# Altium PCB USB2CAN.PcbDoc
Units mil, origin at the board's own origin, x right, y up, seen from the top; angles counter-clockwise.
Board outline 2715.31 x 1015 mil, 2 copper layers (Top Layer, Bottom Layer); 30 components, 25 nets, 157 pads, 36 vias.
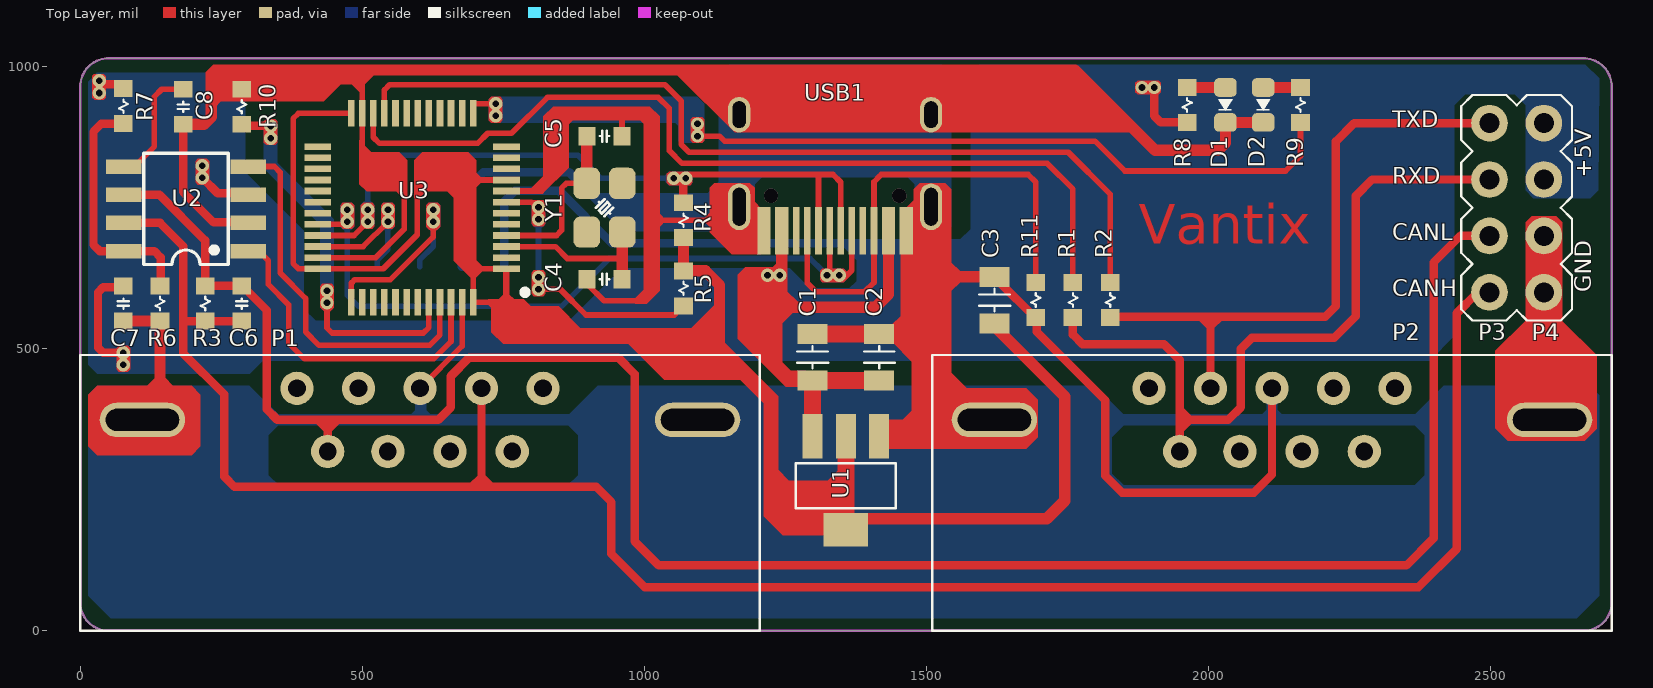
[diagram p0: Top Layer view]
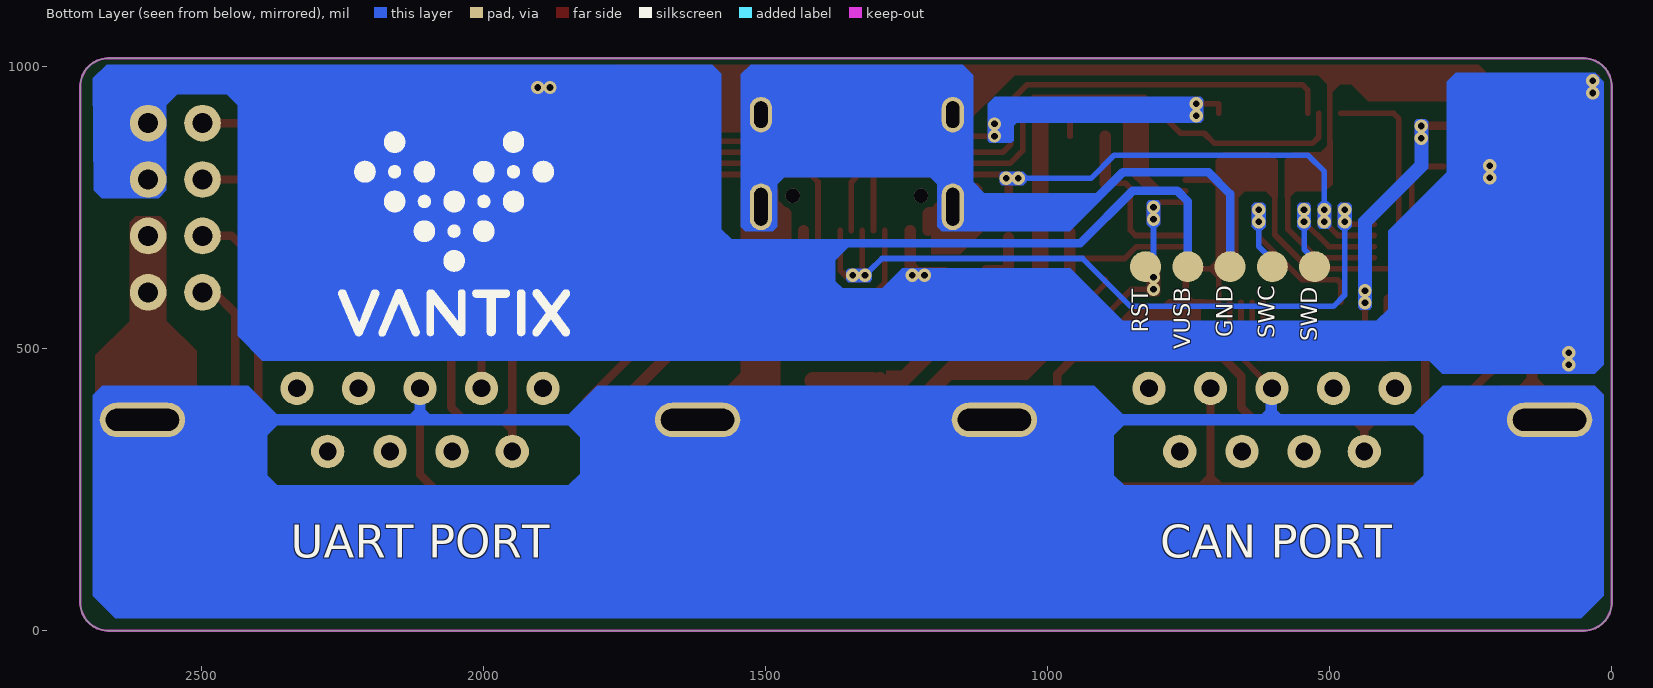
[diagram p1: Bottom Layer view, seen from below]
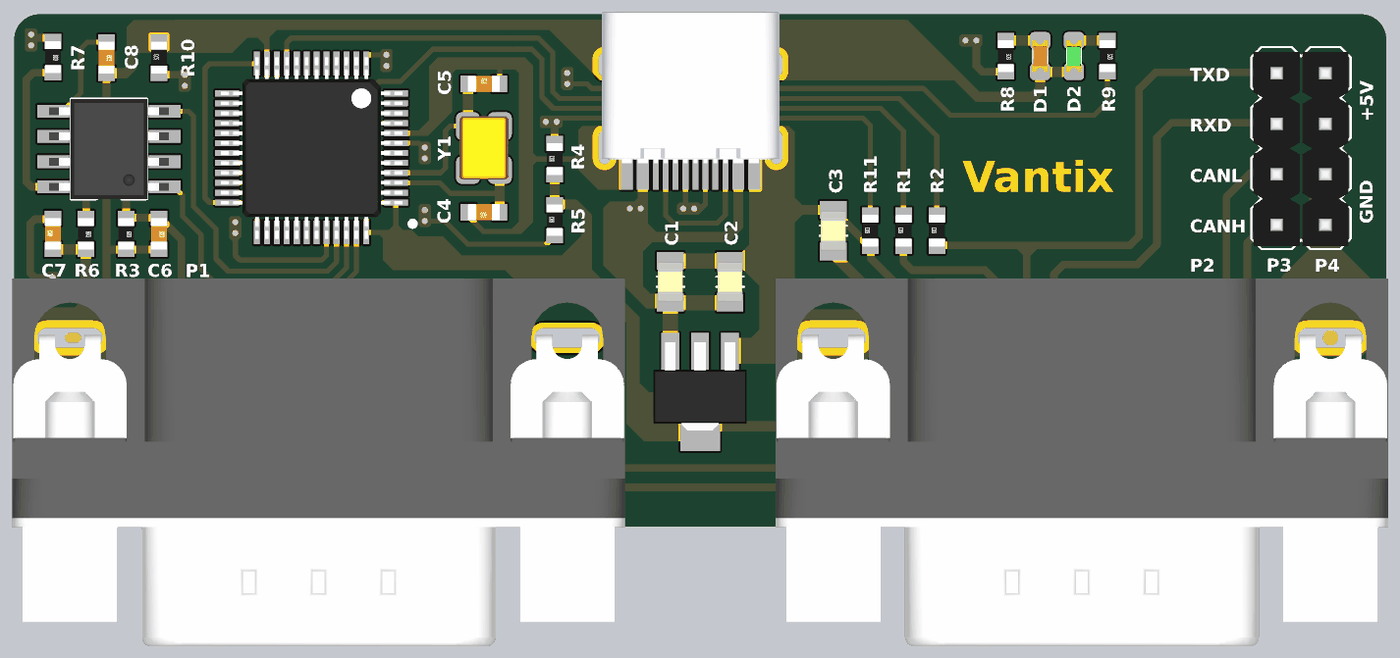
[diagram p2: 3D render of the assembled board from above, using the file's embedded part models]

## Layer stack, top to bottom
Top Solder: solder mask 0.4, Solder Resist, Dk 3.5
Top Layer: signal copper 1.4
Dielectric 1: dielectric 12.6, FR-4, Dk 4.8
Bottom Layer: signal copper 1.4
Bottom Solder: solder mask 0.4, Solder Resist, Dk 3.5

## Board outline
0,50 ccw(c50,50) 50,0 2665.31,0 ccw(c2665.31,50) 2715.31,50 2715.31,965 ccw(c2665.31,965) 2665.31,1015 50,1015 ccw(c50,965) 0,965

## Design rules (kind name [scope] priority, off if disabled: settings)
Clearance [All] p1: gap=6 ignorepadtopadclearanceinfootprint=FALSE
PolygonConnect [All] p1: connectstyle=Relief reliefconductorwidth=10 reliefentries=4 polygonreliefangle="90 Angle" airgapwidth=10
RoutingVias [All] p1: holewidth=28 width=50 viastyle="Through Hole" minholewidth=28 minwidth=50 maxholewidth=28 maxwidth=50
SolderMaskExpansion [All] p1: expansion=4
Width [All] p1: maxlimit=30 minlimit=10 preferedwidth=20
30 further rules are at their usual default settings.

## Components (designator, comment, footprint, x,y, rotation, side; value= is the part's Value field where it differs from the comment)
C1 "CAP_NP" C_0805 1298.31,485 r270 top
C2 "CAP_NP" C_0805 1416.42,485 r270 top
C3 "CAP_NP" C_0805 1620.89,586.2 r270 top
C4 "CAP_NP" C_0603 930.49,623.06 r180 top
C5 "CAP_NP" C_0603 928.49,876.94 r0 top
C6 "CAP_NP" C_0603 286.49,581 r270 top
C7 "CAP_NP" C_0603 76.49,579 r90 top
C8 "CAP_NP" C_0603 182.49,930 r270 top
D1 "LED" LED-0603-R 2030.42,932.2 r90 top
D2 "LED" LED-0603-G 2097.39,932.2 r90 top
P1 "DP9" "DR9T MALE" 602.36,373.91 r0 top
P2 "DP9" "DR9T MALE" 2112.95,373.91 r0 top
P3 "HEADER 4" "JUMP 4" 2498.49,750 r270 top
P4 "HEADER 4" "JUMP 4" 2594.94,750 r270 top
R1 "R" R_0603 1760,586.2 r0 top
R2 "R" R_0603 1826,586.2 r0 top
R3 "R" R_0603 221.49,580 r180 top
R4 "R" R_0603 1069.49,727.87 r0 top
R5 "R" R_0603 1069.49,607.06 r0 top
R6 "R" R_0603 141.49,580 r180 top
R7 "R" R_0603 76.49,930 r180 top
R8 "R" R_0603 1962.49,932.17 r180 top
R9 "R" R_0603 2163.39,932.17 r180 top
R10 "R" R_0603 286.49,929 r0 top
R11 "R" R_0603 1694,586.2 r0 top
U1 "AMS1117" "SOT 89" 1357.37,257 r180 top
U2 "CAN TRANSEIVER" SOP8 187.49,748 r90 top
U3 "STM32F103C8T6" LQFP-48 588.49,750 r90 top locked
USB1 "USB C 16P" "USB C 16P" 1338.41,729.17 r0 top locked
Y1 "12MHz" CRYSTAL-3225 929.49,750 r270 top

## Footprints (in the part's own frame and the unit in brackets; to place one, negate y for a bottom-side part, rotate by r counter-clockwise, add the part's x,y. Pads: shape width x height; smd on the part's side, far side on the other; paste and mask are expansions set on the pad)
C_0603 [mil]
  rect 30x33 smd: 1(-30,0) 2(32,0)
  silkscreen extent -8,-10 10,10, body extent -30,-16 32,16, height 12
C_0805 [mm]
  rect 0.9x1.35 smd: 1(-1.05,0) 2(1.05,0)
  silkscreen extent -0.51,-0.69 0.51,0.71, body extent -1,-0.63 1,0.64, height 0.57
CRYSTAL-3225 [mm]
  rrect50% 1.4x1.2 smd: 1(-1.1,-0.8) 2(-1.1,0.8) 3(1.1,0.8) 4(1.1,-0.8)
  silkscreen extent -0.38,-0.38 0.38,0.38, body extent -1.6,-1.25 1.6,1.25, height 0.77
"DR9T MALE" [mm]
  oval 3.85x1.55 hole 3.3 slot 1 at 90 deg: 0(-12.5,0) 0(12.5,0)
  round 1.5 hole 0.8: 1(-5.54,1.42) 2(-4.155,-1.42) 3(-2.77,1.42) 4(-1.448,-1.42) 5(0,1.42) 6(1.354,-1.42) 7(2.77,1.42) 8(4.155,-1.42) 9(5.54,1.42)
  silkscreen extent -15.3,-9.5 15.3,2.92, body extent -15.4,-15.52 15.4,2.98, height 12.51
"JUMP 4" [mil]
  round 65 hole 35.43: 1(-150,0) 2(-50,0) 3(50,0) 4(150,0)
  silkscreen extent -200,-50 200,48, body extent -190,-46 194,46, height 320
LED-0603-G [mil] "SMDCHIP-SIZE"
  rrect50% 33x40 smd: 1(31,0) 2(-31,0)
  silkscreen extent -10,-13 10,12, body extent -31,-16 32,16, height 24
LED-0603-R [mil] "SMDCHIP SIZE"
  rrect50% 33x40 smd: 1(31,0) 2(-31,0)
  silkscreen extent -10,-13 10,12, body extent -31,-16 32,16, height 26
LQFP-48 [mm] "for STM8S105C6T6"
  rect 0.3x1.2 smd: 1(-2.75,-4.25) 2(-2.25,-4.25) 3(-1.75,-4.25) 4(-1.25,-4.25) 5(-0.75,-4.25) 6(-0.25,-4.25) 7(0.25,-4.25) 8(0.75,-4.25) 9(1.25,-4.25) 10(1.75,-4.25) 11(2.25,-4.25) 12(2.75,-4.25) 25(2.75,4.25) 26(2.25,4.25) 27(1.75,4.25) 28(1.25,4.25) 29(0.75,4.25) 30(0.25,4.25) 31(-0.25,4.25) 32(-0.75,4.25) 33(-1.25,4.25) 34(-1.75,4.25) 35(-2.25,4.25) 36(-2.75,4.25)
  rect 1.2x0.3 smd: 13(4.25,-2.75) 14(4.25,-2.25) 15(4.25,-1.75) 16(4.25,-1.25) 17(4.25,-0.75) 18(4.25,-0.25) 19(4.25,0.25) 20(4.25,0.75) 21(4.25,1.25) 22(4.25,1.75) 23(4.25,2.25) 24(4.25,2.75) 37(-4.25,2.75) 38(-4.25,2.25) 39(-4.25,1.75) 40(-4.25,1.25) 41(-4.25,0.75) 42(-4.25,0.25) 43(-4.25,-0.25) 44(-4.25,-0.75) 45(-4.25,-1.25) 46(-4.25,-1.75) 47(-4.25,-2.25) 48(-4.25,-2.75)
  silkscreen extent -3.94,-5.21 -3.68,-4.95, body extent -4.57,-4.57 4.57,4.57, height 1.62
R_0603 [mil]
  rect 33x30 smd: 1(0,31) 2(0,-31)
  silkscreen extent -8,-12 8,12, body extent -16,-31 16,32, height 12
SOP8 [mm]
  rect 0.65x1.6 smd: 1(-1.905,-2.8) 2(-0.635,-2.8) 3(0.635,-2.8) 4(1.905,-2.8) 5(1.905,2.8) 6(0.635,2.8) 7(-0.635,2.8) 8(-1.905,2.8)
  silkscreen extent -2.51,-1.91 2.51,1.91, body extent -2.51,-3.02 2.51,3.02, height 1.6
"SOT 89" [mm]
  rect 0.9x2 smd: 1(-1.5,-2.225) 2(0,-2.225) 3(1.5,-2.225)
  rect 2x1.5 smd: 2(0,1.975)
  silkscreen extent -2.25,-1.02 2.25,1.02, body extent -2.35,-2.76 2.35,1.69, height 1.71
"USB C 16P" [mm]
  oval 1x2.1 hole 0.6 slot 1.7 at 90 deg: 0(-4.32,0.57) 0(4.32,0.57)
  oval 1x1.6 hole 0.6 slot 1.2 at 90 deg: 0(-4.32,4.72) 0(4.32,4.72)
  rect 0.6x2.14 smd: 1(3.2,-0.5) 2(2.4,-0.5) 11(-2.4,-0.5) 12(-3.2,-0.5)
  rect 0.3x2.14 smd: 3(1.75,-0.5) 4(1.25,-0.5) 5(0.75,-0.5) 6(0.25,-0.5) 7(-0.25,-0.5) 8(-0.75,-0.5) 9(-1.25,-0.5) 10(-1.75,-0.5)
  body extent -4.47,-0.23 4.47,7.35, height 3.26

## Part data
D1 D2: "Blue 465nm LED Indication - Discrete 3.8V 0603 (1608 Metric)", Color=Blue, Current - Test=20mA, Lens Color=Colorless, Manufacturer="Everlight Electronics Co Ltd", Manufacturer Part Number=QTLP600CBTR, Millicandela Rating=20mcd, Package / Case="0603 (1608 Metric)", Supplier Part Number 1=1080-1401-2-ND, Voltage - Forward (Vf) (Typ)=3.8V, Category=Optoelectronics, ComponentLink1Description=http://media.digikey.com/pdf/Data%20Sheets/Everlight%20PDFs/QTLP600C.pdf, ComponentLink1URL=http://media.digikey.com/pdf/Data%20Sheets/Everlight%20PDFs/QTLP600C.pdf, Features=-, Height (Max)=0.80mm, Lens Style/Size="Rectangle with Flat Top, 1.20mm x 0.80mm", Lens Transparency=Clear, Mounting Type="Surface Mount", Packaging="Tape & Reel (TR)", Part Status=Active, Pricing 1="2000=0.23786, 6000=0.22937, 10000=0.22597 (USD)", RoHS="RoHS Compliant", Size / Dimension="1.60mm L x 0.80mm W", Stock 1=2000, Supplier 1=Digi-Key, Viewing Angle=100°, Wavelength - Dominant=465nm, Wavelength - Peak=430nm
R1 R2 R3 R4 R5 R6 R7 R8 R9 R10 R11: library part RESISTOR
U2: library part MCP2551
U3: "MCU 32BIT 64KB FLASH 48LQFP;  ARM® Cortex®-M3 STM32 F1 Microcontroller IC 32-Bit 72MHz 64KB (64K x 8) FLASH", Manufacturer=STMicroelectronics, Operating Temperature="-40°C ~ 85°C (TA)", Package / Case=48-LQFP, Supplier Part Number 1=497-6063-ND, Voltage - Supply (Vcc/Vdd)="2 V ~ 3.6 V", Category="Integrated Circuits (ICs)", ComponentLink1Description=http://media.digikey.com/pdf/Data%20Sheets/ST%20Microelectronics%20PDFS/STM32F103x8,B.pdf, ComponentLink1URL=http://media.digikey.com/pdf/Data%20Sheets/ST%20Microelectronics%20PDFS/STM32F103x8,B.pdf, Connectivity="CAN, I²C, IrDA, LIN, SPI, UART/USART, USB", Core Processor="ARM® Cortex®-M3", Core Size=32-Bit, Data Converters="A/D 10x12b", EEPROM Size=-, Manufacturer Part Number=STM32F103C8T6, Number of I/O=37, Oscillator Type=Internal, Packaging=Tray, Part Status=Active, Peripherals="DMA, Motor Control PWM, PDR, POR, PVD, PWM, Temp Sensor, WDT", Pricing 1="1=6.06, 10=5.438, 100=4.4558, 500=3.7931, 1000=3.199 (USD)", Program Memory Size="64KB (64K x 8)", Program Memory Type=FLASH, RAM Size="20K x 8", RoHS="RoHS Compliant", Speed=72MHz, Stock 1=3485, Supplier 1=Digi-Key
Y1: library part CRYSTAL-3225

## Free pads (board coordinates)
  round 55 smd far side: 1(526.89,645.5) 2(601.79,645.5) 3(676.69,645.5) 4(751.59,645.5) 5(826.49,645.5)

## Via types
v1: diameter 23.62, hole 11.81, Top Layer to Bottom Layer, tented both sides, 34 vias
v2: diameter 25.59, hole 25.59, Top Layer to Bottom Layer, tented both sides, 2 vias

## Nets (pads, with @x,y where several pads share a name; then routed paths per layer and width w, separated by ;. In a path a pad name is that pad's centre, name@x,y a point inside that pad or via, vN(x,y) a via of type N, cw(c..) or ccw(c..) an arc to the next point about the centre after c; other vN are vias at no path point)
+3V3: C3.2 R4.2 R5.1 U1.2 U3.1 U3.9 U3.24 U3.36 U3.48 | length 3195.1
  Top Layer w10: U3.24 386.81,917.32 377.49,908 377.49,651 386.76,641.73 U3.36 537.22,641.73 597.49,702 597.49,783.87 612.83,799.21 696.76,799.21 ; U3.1 696.76,641.73 ; U3.9 696.76,799.21 ; 1133.49,531.1 1132.79,531.8 884.59,531.8 847.89,568.5 796.19,568.5 782.01,582.68 U3.48 696.76,641.73 ; 696.76,641.73 696.76,799.21
  Top Layer w20: R4.2 R5.1 1108.58,638.06 1133.49,613.15 1133.49,531.1 1133.49,505 1227.49,411 1227.49,243.1 1271.99,198.6 1370.37,198.6 1713.69,198.6 1745.59,230.5 1745.59,415.4 C3.2@1618.51,542.48
  Top Layer w30: U1.2@1357.37,179.24 U1.2@1357.37,325.24
CAN_H: C6.2 P1.7 P3.4 R3.1 U2.7 | length 3680.2
  Top Layer w15: U2.7 141.49,723 182.49,682 182.49,551 ; C6.2 R3.1 184.49,549 182.49,551 ; P1.7 711.42,255 ; P3.4 2477.49,600 2440.49,563 2440.49,145.2 2372.69,77.4 1000.59,77.4 941.79,136.2 941.79,228.2 914.99,255 711.42,255 ; 182.49,551 182.49,492 255.49,419 255.49,273 273.49,255 711.42,255
CAN_L: C6.1 P1.2 P3.3 R3.2 U2.6 | length 3720.3
  Top Layer w15: U2.6 140.49,773 221.49,692 R3.2 ; R3.2@226.49,612 C6.1@285.49,612 ; C6.1 287.99,611 330.49,568.5 330.49,392.86 349.24,374.1 438.78,374.1 ; P1.2 438.78,374.1 ; P3.3 2497.79,700.7 2447.19,700.7 2399.39,652.9 2399.39,163.9 2351.29,115.8 1025.69,115.8 982.89,158.6 982.89,455.2 953.79,484.3 689.79,484.3 656.79,451.3 656.79,396 634.89,374.1 438.78,374.1
CAN_RX: U2.4 U3.45 | length 676.6
  Top Layer w10: U2.4 344.24,823 354.49,812.76 354.49,634.15 399.49,589.15 399.49,530 423.49,506 619.49,506 637.7,524.21 U3.45
CAN_TX: U2.1 U3.46 | length 585.6
  Top Layer w10: U2.1 316.43,673 333.49,655.94 333.49,614 369.49,578 369.49,510.32 397.81,482 626.49,482 657.39,512.9 U3.46
GND: C1.1 C2.1 C3.1 C4.2 C5.2 C7.1 C8.2 D1.2 D2.2 P1.0 P1.5 P2.0 P2.5 P4.3 P4.4 pad.3 R6.1 R10.1 R11.2 U1.1 U2.2 U3.8 U3.23 U3.35 U3.47 USB1.0 USB1.1 USB1.12 | length 10189.8
  Top Layer w10: U2.2@296.72,724 U2.2 ; U3.35 523.91,661.42 574.49,712 574.49,781.3 499.91,855.88 U3.23 499.91,994 ; P1.5 677.07,504.52 U3.47 ; U3.8 818.02,779.53 861.49,823 861.49,900 871.49,910 960.49,910 ; C4.2 898.49,615 928.49,585 993.49,585 1010.49,602 1010.49,728 ; C5.2 960.49,910 ; USB1.0@1168.33,915 USB1.0@1168.33,937 ; USB1.0@1169.49,728 1010.49,728 ; 960.49,910 998.49,910 1010.49,898 1010.49,728
  Top Layer w15: C8.2 182.49,778 236.49,724 U2.2@296.72,724 ; C3.1 1629.75,627.54 1629.75,617.95 1692.5,555.2 R11.2 1695.5,555.2 1695.5,530.5 1817,409 1817,275 1847,245 2081,245 2112.95,276.95 P2.5
  Top Layer w20: C7.1 R6.1 141.49,392.86 122.54,373.91 P1.0@110.24,373.91 ; C8.2@183.49,898 219.49,898 232.49,911 232.49,949 243.49,960 R10.1 320.49,994 ; 320.68,994.2 320.49,994 ; USB1.0@1168.33,937 1168.33,992.84 1169.49,994 ; USB1.0@1177.28,741.61 1210.61,741.61 1212.43,739.8 USB1.12 ; C2.1 1511.31,526.34 1512.09,527.12 ; USB1.0@1499.54,741.61 1466.2,741.61 1464.39,739.8 USB1.1 1464.39,643.79 1480.65,627.54 1512.09,627.54 ; USB1.0@1508.49,915 1508.49,993 ; P2.0@1620.83,373.91 1512.09,373.91 1512.09,527.12 ; C3.1 1512.09,627.54 ; D2.2 D1.2 2030.42,865.04 2017.09,851.7 1905.99,851.7 1763.69,994 1169.49,994 ; 320.49,994 499.91,994 1169.49,994 ; 1512.09,527.12 1512.09,627.54
  Top Layer w30: C1.1 C2.1 ; P4.3 P4.4 2594.94,384.57 2605.61,373.91 P2.0@2605.08,373.91
  Bottom Layer w15: pad.3 676.69,774.6 714.89,812.8 867.09,812.8 928.27,751.61 USB1.0@1168.33,751.61
  Bottom Layer w20: P1.0@110.24,373.91 603.49,373.91 ; P1.5 603.49,428.68 603.49,373.91 ; USB1.0@1168.33,751.61 USB1.0@1168.33,915 ; USB1.0@1508.49,751.61 USB1.0@1508.49,915 ; P2.5 2112.95,373.91 ; P2.0@2605.08,373.91 2112.95,373.91 ; 603.49,373.91 1094.49,373.91 1620.83,373.91 2112.95,373.91
LED: R9.1 U3.13 | length 1585.6
  Top Layer w10: U3.13 696.76,933.68 697.66,934.58 v1(736.49,934.58) ; v1(1094.49,877) 1133.49,877 1142.49,868 1799,868 1852,815 2136.79,815 2163.39,841.6 R9.1
  Bottom Layer w10: v1@1090.8,898.58 v1(1094.49,898.58)
  Bottom Layer w15: v1(736.49,913) 1076.38,913 v1@1090.8,898.58
NetC4_1: C4.1 U3.3 Y1.3 | length 297.5
  Top Layer w10: U3.3 842.39,681.1 863.49,660 960.74,660
  Top Layer w20: C4.1 960.74,623.3 960.74,660 960.74,706.44 Y1.3
NetC5_1: C5.1 U3.4 Y1.1 | length 308.3
  Top Layer w10: U3.4 844.28,700.79 853.49,710 853.49,785 861.8,793.31 Y1.1
  Top Layer w20: Y1.1 898.24,793.56 898.24,876.7 C5.1
NetC8_1: C8.1 U2.5 | length 213.8
  Top Layer w10: U2.5 95.99,823 131.49,858.5 131.49,947 144.49,960 C8.1
NetD1_1: D1.1 R8.2 | length 67.9
  Top Layer w20: R8.2 D1.1
NetD2_1: D2.1 R9.2 | length 66
  Top Layer w20: D2.1 R9.2
NetR5_2: pad.5 R5.2 U3.7 | length 488.6
  Top Layer w10: U3.7 799.96,759.84 808.8,751 v1(812.49,751) ; v1(812.49,605.42) 851.07,605.42 896.79,559.7 1053.13,559.7 R5.2
  Top Layer w15: v1(812.49,605.42) v1(812.49,627) ; v1(812.49,729.42) v1(812.49,751)
  Bottom Layer w10: v1(812.49,627) v1(812.49,729.42)
NetR6_2: R6.2 R7.1 U2.8 | length 439.3
  Top Layer w15: R7.1 37.49,899 23.49,885 23.49,684 34.49,673 U2.8 131.49,673 142.49,662 142.49,612 R6.2
NetR10_2: R10.2 U3.44 | length 641.6
  Top Layer w10: R10.2 R10.2@289.49,895 ; v1(437.49,581.42) 437.49,537 446.49,528 608.09,528 618.02,537.93 U3.44
  Top Layer w15: R10.2@289.49,895 v1(337.49,895)
  Bottom Layer w15: v1(337.49,873.42) 337.49,825 437.49,725 v1(437.49,603)
NetR11_1: R11.1 USB1.3 USB1.9 | length 878.9
  Top Layer w10: USB1.9 1289.2,616.12 1304.31,601 1390.82,601 1407.31,617.49 USB1.3 1407.31,795.92 1417.39,806 1417.49,806 1420.35,808.87 1680.58,808.87 1694,795.45 R11.1
RX: P2.2 P3.2 R1.2 | length 1309.9
  Top Layer w15: R1.2 1760,525 1777,508 1921.49,508 1949.37,480.12 1949.37,375.7 ; P2.2 1949.37,374.2 2035.69,374.2 2057.59,396.1 2057.59,499.7 2077.09,519.2 2222.99,519.2 2261.69,557.9 2261.69,771.2 2290.49,800 P3.2
SWC: pad.2 U3.37 | length 329.1
  Top Layer w10: U3.37 480.49,582.94 480.49,616.14 486.35,622 549.49,622 625.68,698.19 625.68,724.79 v1(625.89,725)
  Bottom Layer w10: pad.2 601.79,657.4 625.89,681.5 v1(625.89,725)
  other v1: 625.89,746.58
SWD: pad.1 U3.34 | length 251.3
  Top Layer w10: U3.34 501.59,681.1 v1(545.49,725)
  Bottom Layer w10: pad.1 526.89,657.68 545.49,676.28 v1(545.49,725) v1(545.49,746.58)
TX: P2.3 P3.1 R2.2 | length 1112.8
  Top Layer w15: R2.2@1826,557.06 2003.9,557.06 ; P2.3 2003.9,557.06 ; P3.1 2258.69,900 2226.15,867.46 2226.15,575.46 2207.74,557.06 2003.9,557.06
U3_RX: R1.1 U3.22 | length 1598.4
  Top Layer w10: U3.22 519.59,874.9 530.49,864 704.49,864 722.49,882 764.69,882 828.39,945.7 1024.86,945.7 1044.49,926.07 1044.49,851 1066.91,828.58 1714.47,828.58 1760,783.05 R1.1
U3_TX: R2.1 U3.21 | length 1614.3
  Top Layer w10: U3.21 539.28,958.79 548.49,968 1036.56,968 1065.49,939.07 1065.49,862 1079.2,848.29 1751.71,848.29 1826,774 R2.1
USB_D+: R4.1 U3.33 USB1.6 USB1.8 | length 1293.9
  Top Layer w10: U3.33 485.28,700.79 v1(509.49,725) ; v1(1073.57,802) 1080.44,808.87 1308,808.87 ; USB1.8 1308.88,807.98 1308,808.87 ; USB1.6 1348.25,795.25 1334.63,808.87 1308,808.87
  Top Layer w15: v1(509.49,725) v1(509.49,746.58) ; v1(1051.99,802) v1(1073.57,802) 1069.49,797.92 R4.1
  Bottom Layer w10: v1(509.49,746.58) 509.49,814 538.49,843 882.49,843 923.49,802 v1(1051.99,802)
USB_D-: U3.32 USB1.5 USB1.7 | length 1289.9
  Top Layer w10: U3.32 v1@465.27,720.47 ; v1@1328.57,631.9 USB1.7 ; v1@1330.46,630 v1(1345.46,630) ; v1@1343.57,631.9 v1(1345.46,630) ; USB1.5 1367.94,639 1358.94,630 v1(1345.46,630)
  Top Layer w15: v1(473.49,725) v1(473.49,746.58) ; v1(1323.88,630) v1@1330.46,630
  Bottom Layer w10: v1(473.49,725) 473.49,595 493.49,575 853.07,575 938.07,660 1293.88,660 v1@1316.38,637.5
VUSB: C1.2 C2.2 C7.2 P4.1 P4.2 pad.4 R7.2 R8.1 U1.3 U2.3 USB1.2 USB1.11 | length 5897.6
  Top Layer w15: v1(33.49,975) 35.82,975 42.32,968.5 68.99,968.5 R7.2 R7.2@76.99,960.5 ; v1(76.49,471.42) v1(76.49,493) 40.49,493 31.49,502 31.49,600 40.49,609 74.49,609 C7.2 ; v1(216.49,802.9) 243.73,775.66 295.07,775.66 U2.3 ; v1(1218.34,630) v1(1239.92,630) v1@1243.92,630 ; v1(1904.07,963.17) 1904.07,912.72 1915.62,901.17 R8.1
  Top Layer w20: 1243.92,574 1243.92,630 USB1.11 ; C1.2@1311.31,443.66 C1.2 1257.83,443.66 1212.49,489 1212.49,545 1240.92,573.43 1409.76,573.43 1432.9,596.57 USB1.2
  Top Layer w30: U1.3 C1.2 ; C1.2@1311.31,443.66 C2.2
  Bottom Layer w15: v1(33.49,975) 176.91,975 216.49,935.42 v1(216.49,824.48) v1(216.49,802.9) 216.49,540 ; v1(76.49,493) 76.49,520 96.49,540 216.49,540 ; pad.4 751.59,761.3 770.39,780.1 849.19,780.1 942.69,686.6 1357.19,686.6 1389.69,654.1 1389.69,596.5 1391.19,595 ; v1@1222.34,630 v1(1218.34,630) 958.49,630 868.49,540 216.49,540
  Bottom Layer w24: v1(1882.49,963.17) v1(1904.07,963.17) ; P4.1 2594.94,938.54
  Bottom Layer w25: v1@1243.92,630 1278.92,595 1391.19,595 1551.59,595 1591.49,634.9 1591.49,935 1619.66,963.17 v1(1882.49,963.17) ; v1(1904.07,963.17) 2570.32,963.17 2594.94,938.54 ; P4.2 P4.1
  other v1: 33.49,953.42
pads on no net: P1.1 P1.3 P1.4 P1.6 P1.8 P1.9 P2.1 P2.4 P2.6 P2.7 P2.8 P2.9 U3.2 U3.5 U3.6 U3.10 U3.11 U3.12 U3.14 U3.15 U3.16 U3.17 U3.18 U3.19 U3.20 U3.25 U3.26 U3.27 U3.28 U3.29 U3.30 U3.31 U3.38 U3.39 U3.40 U3.41 U3.42 U3.43 USB1.4 USB1.10 Y1.2 Y1.4
copper on no net:
  other v2: 1224.63,771.3 1452.19,771.3

## Keep-outs
Keep-Out Layer:
  the board outline again, w4

## Other copper
Top Layer:
  region: 1213,785
  region net CAN_H: 684.29,255 711.42,282.13 738.55,255
  region net CAN_L: 465.91,374.1 438.78,346.97 411.65,374.1
  region net TX: 2031.03,557.06 2003.9,529.93 1976.77,557.06
  region net RX: 1949.37,401.12 1976.5,373.99 1949.37,346.86
  region net USB_D-: 1311.96,621.9 1311.96,638 1315.96,642 1353.88,642 1365.88,630 1353.78,617.9 1315.96,617.9
  region net NetR10_2: 429.39,614.92 445.49,614.92 449.49,610.92 449.49,573 437.49,561 425.39,573.1 425.39,610.92
  region net SWC: 617.79,758.5 633.89,758.5 637.89,754.5 637.89,716.58 625.89,704.58 613.79,716.68 613.79,754.5
  region net NetR10_2: 325.39,902.9 329.39,906.9 345.49,906.9 349.49,902.9 349.49,865.4 345.49,861.4 329.39,861.4 325.39,865.4
  region net VUSB: 21.39,984.27 24.02,986.9 41.49,986.9 45.49,982.9 45.49,945.4 41.49,941.4 25.39,941.4 21.39,945.4
  region net LED: 724.39,942.48 728.39,946.48 744.49,946.48 748.49,942.48 748.49,904.98 744.49,900.98 728.39,900.98 724.39,904.98
  region net LED: 1082.39,906.48 1086.39,910.48 1102.49,910.48 1106.49,906.48 1106.49,868.98 1102.49,864.98 1086.39,864.98 1082.39,868.98
  region net VUSB: 1874.59,951.07 1870.59,955.07 1870.59,971.17 1874.59,975.17 1912.09,975.17 1916.09,971.17 1916.09,955.07 1912.09,951.07
  region net GND: 1488.5,793.4 1533.48,793.4 1544.29,782.59 1544.29,652.7 1559.89,637.1 1559.89,617.9 1544.39,602.4 1544.39,457.1 1571.39,430.1 1677.49,430.1 1697.99,409.6 1697.99,343.1 1677.49,322.6 1417.49,322.6 1417.49,373.91 1458.39,373.91 1474.49,390 1474.49,477 1439.49,512 1439.49,543 1454.39,557.9 1454.39,740.1 1477.69,763.4 1477.69,782.59
  region net +3V3: 723.44,587.5 741.99,587.5 750.39,595.9 750.39,638.4 760.99,638.4 760.99,596.1 769.59,587.5 786.49,587.5 798.69,575.3 848.19,575.3 886.79,536.7 1083.39,536.7 1123.79,577.1 1142.99,577.1 1142.99,510.2 1237.29,415.9 1237.29,285.4 1256.59,266.1 1325.49,266.1 1345.49,286.1 1345.49,169.1 1245.39,169.1 1211.89,202.6 1211.89,403.4 1170.29,445 1035.19,445 971.79,508.4 749.59,508.4 729.09,528.9 729.09,572.55 723.44,578.2
  region net +3V3: 709.99,804 701.89,812.1 701.89,834.3 687.74,848.45 606.74,848.45 592.59,834.3 592.59,767.9 601.89,767.9 613.09,779.1 650.69,779.1 661.89,767.9 661.89,656.1 692.39,625.6 700.89,625.6 712.49,637.2 712.49,646.2 701.89,656.8 701.89,786.4 709.99,794.5
  region net GND: 494.89,869.3 515.74,848.45 565.44,848.45 579.49,834.4 579.49,769 570.49,769 560.39,779.1 507.79,779.1 494.89,792
  region net GND: 504.59,865
  region net SWD: 557.59,717.1 553.59,713.1 537.49,713.1 533.49,717.1 533.49,754.6 537.49,758.6 553.59,758.6 557.59,754.6
  region net GND: 2573.49,735 2616.49,735 2627.49,724 2627.49,549 2688.49,488 2688.49,358 2667.49,337 2530.49,337 2508.49,359 2508.49,496 2562.49,550 2562.49,724
  region: 2573.49,735
  region net NetR5_2: 820.59,593.5 804.49,593.5 800.49,597.5 800.49,632.2 807.59,639.3 817.39,639.3 824.59,632.1 824.59,597.5
  region net NetR5_2: 800.39,760.27 803.02,762.9 820.49,762.9 824.49,758.9 824.49,721.4 820.49,717.4 804.39,717.4 800.39,721.4
  region net NetR5_2: 800.39,634.9 804.39,638.9 820.49,638.9 824.49,634.9 824.49,597.4 820.49,593.4 804.39,593.4 800.39,597.4
  region net VUSB: 88.59,463.52 84.59,459.52 68.49,459.52 64.49,463.52 64.49,501.02 68.49,505.02 84.59,505.02 88.59,501.02
  region net VUSB: 228.59,795 224.59,791 208.49,791 204.49,795 204.49,832.5 208.49,836.5 224.59,836.5 228.59,832.5
  region net USB_D-: 485.59,717.1 481.59,713.1 465.49,713.1 461.49,717.1 461.49,754.6 465.49,758.6 481.59,758.6 485.59,754.6
  region net USB_D+: 521.59,717.1 517.59,713.1 501.49,713.1 497.49,717.1 497.49,754.6 501.49,758.6 517.59,758.6 521.59,754.6
  region net USB_D+: 1081.47,814.1 1085.47,810.1 1085.47,794 1081.47,790 1043.97,790 1039.97,794 1039.97,810.1 1043.97,814.1
  region net GND: 495.39,954.9 481.71,968.58 462.27,968.58 432.09,938.4 249.49,938.4 238.29,927.2 222.42,937.72 222.6,990.11 236.09,1003.6 520.8,1003.6 520.8,984.79 504.59,968.58 504.59,954.9
  region net GND: 983.79,589.6 998.69,604.5 998.69,899.2 990.79,907.1 874.89,907.1 865.89,898.1 865.89,821.3 820.19,775.6 797.79,775.6 797.79,782.4 820.79,805.4 820.79,911.9 838.29,929.4 1010.09,929.4 1027.09,912.4 1027.09,739.4 1038.49,728 1027.09,716.6 1027.09,602.5 1004.59,580 983.79,580
  region net GND: 197.3,311.1 29.99,311.1 13.99,327.1 13.99,418.71 29.88,434.6 119.19,434.6 132.79,448.2 150.69,448.2 164.29,434.6 197.3,434.6 213.09,418.81 213.09,326.89
  region net VUSB: 1234.39,650.5 1228.09,644.2 1178.79,644.2 1166.09,631.5 1166.09,517.5 1251.19,432.4 1286.09,432.4 1286.09,460.9 1259.59,460.9 1244.49,476 1244.49,545 1263.59,564.1 1272,564.1 1272,583 1253,602 1253,650.5
  region net GND: 1206.69,749 1195.49,760.2 1195.49,785 1186.79,793.7 1124.29,793.7 1116.39,785.8 1116.39,740.9 1103.94,728.45 1116.39,716 1116.39,706.6 1155.49,667.5 1206.69,667.5
  region: 1550.89,674.8
  region net GND: 1058.19,1003.9 1764.49,1003.9 1884.89,883.5 1159.99,883.5 1058.19,985.3
  region net GND: 1276.43,526.34
  text "Vantix" at 1876.75,663.3 h120
Bottom Layer:
  region net SWC: 617.79,758.5 633.89,758.5 637.89,754.5 637.89,716.58 625.89,704.58 613.79,716.68 613.79,754.5
  region net USB_D+: 1085.49,810.1 1085.49,794 1081.49,790 1043.57,790 1031.57,802 1043.67,814.1 1081.49,814.1
  region net NetR5_2: 804.39,762.92 820.49,762.92 824.49,758.92 824.49,721 812.49,709 800.39,721.1 800.39,758.92
  region net SWD: 537.39,758.5 553.49,758.5 557.49,754.5 557.49,716.58 545.49,704.58 533.39,716.68 533.39,754.5
  region net USB_D-: 465.39,758.5 481.49,758.5 485.49,754.5 485.49,716.58 473.49,704.58 461.39,716.68 461.39,754.5
  region net NetR10_2: 325.39,902.92 325.39,820.1 425.49,720 425.49,573.5 429.49,569.5 445.59,569.5 449.59,573.5 449.59,729.9 349.49,830 349.49,902.92
  region net LED: 724.39,942.48 728.39,946.48 1094.01,946.48 1106.49,934 1106.49,868.98 1102.49,864.98 1064.49,864.98 1060.49,868.98 1060.49,895 1054.51,900.98 728.39,900.98 724.39,904.98
  region net NetR10_2: 329.39,906.92 345.49,906.92 349.49,902.92 349.49,868.22 342.39,861.12 332.59,861.12 325.39,868.32 325.39,902.92
  region net NetR10_2: 445.59,569.5 429.49,569.5 425.49,573.5 425.49,608.2 432.59,615.3 442.39,615.3 449.59,608.1 449.59,573.5
  region net LED: 724.39,942.48 728.39,946.48 744.49,946.48 748.49,942.48 748.49,904.98 744.49,900.98 728.39,900.98 724.39,904.98
  region net LED: 1082.39,906.48 1086.39,910.48 1102.49,910.48 1106.49,906.48 1106.49,868.98 1102.49,864.98 1086.39,864.98 1082.39,868.98
  region net VUSB: 1915.99,971.22 1915.99,955.12 1911.99,951.12 1877.29,951.12 1870.19,958.22 1870.19,968.02 1877.39,975.22 1911.99,975.22
  region net GND: 1526.89,1003.9 1544.09,986.7 1544.09,716.7 1535.89,708.5 1487.5,708.5 1479.3,716.7 1479.3,791.55 1467.03,803.82 1208.26,803.82 1195.99,791.55 1195.99,716.7 1187.79,708.5 960.79,708.5 893.29,776 1112.49,776 1132.29,795.8 1132.29,985.2 1150.99,1003.9
  region net USB_D-: 1315.98,617.9 1311.98,621.9 1311.98,638 1315.98,642 1353.48,642 1357.48,638 1357.48,621.9 1353.48,617.9
  region net USB_D+: 517.59,713.08 501.49,713.08 497.49,717.08 497.49,755 509.49,767 521.59,754.9 521.59,717.08
  region net VUSB: 1294.09,606.4 1257.59,642.9 960.29,642.9 866.69,549.3 417.19,549.3 396.49,570 396.49,709 292.49,813 292.49,973.5 276.93,989.05 29.54,989.05 13.99,973.5 13.99,538.6 13.99,471.8 30.09,455.7 300.49,455.7 323.89,479.1 917.09,479.1 2392.59,479.1 2436.49,523 2436.49,931.45 2456.77,951.73 2542.21,951.73 2562.49,931.45 2562.49,781 2576.49,767 2677.49,767 2691.49,781 2693.23,979.26 2668.59,1003.9 2458.15,1003.9 1594.88,1003.9 1578.49,987.51 1578.49,712 1560.49,694 1340.49,694 1376.49,658 1376.49,620 1362.89,606.4
  region net GND: 13.99,349.58 333.49,349.58 333.49,276 351.79,257.7 864.49,257.7 882.79,276 882.79,349.58 1829.19,349.58 1829.19,278.7 1850.19,257.7 2365.89,257.7 2384.19,276 2384.19,349.58 2693.19,349.58 2693.19,61.8 2653.29,21.9 53.89,21.9 13.99,61.8
  region net GND: 29.99,434.7 299.89,434.7 351.59,383 585.79,383 594.79,392 612.89,392 621.69,383.2 865.79,383.2 917.29,434.7 1798.79,434.7 1850.29,383.2 2095.19,383.2 2103.59,391.6 2122.59,391.6 2130.99,383.2 2366.09,383.2 2417.59,434.7 2676.09,434.7 2693.19,417.6 2693.19,311.1 2419.19,311.1 2366.09,364.2 1850.09,364.2 1796.99,311.1 917.89,311.1 864.79,364.2 351.09,364.2 297.99,311.1 13.99,311.1 13.99,418.7

## Silkscreen, mask and mechanical layers (free items; w line width, h text height)
Top Overlay:
  region: 1066.49,1004
  text "TXD" at 2326.53,882.99 h50
  text "+5V" at 2689,802.9 h50 r90
  text "RXD" at 2326.49,782.99 h50
  text "CANL" at 2326.49,682.96 h50
  text "GND" at 2688.49,600 h50 r90
  text "CANH" at 2326.49,582.96 h50
Bottom Overlay:
  drawing of 3840 lines, arcs and shapes, not listed
  text "RST" at 812.3,528.34 h50 r270
  text "GND" at 662.5,519.98 h50 r270
  text "SWC" at 587.6,518.5 h50 r270
  text "SWD" at 512.7,513.28 h50 r270
  text "VUSB" at 737.4,499.1 h50 r270
  text "CAN PORT" at 800.55,109.5 h100
  text "UART PORT" at 2342.54,109.5 h100
Top Solder:
  text "Vantix" at 1876.75,663.3 h120
Bottom Solder:
  text "tungbt8@vingroup.net" at 1580.5,43 h50